# EAGLE board module_pcb v106 (EAGLE 9.7.0)
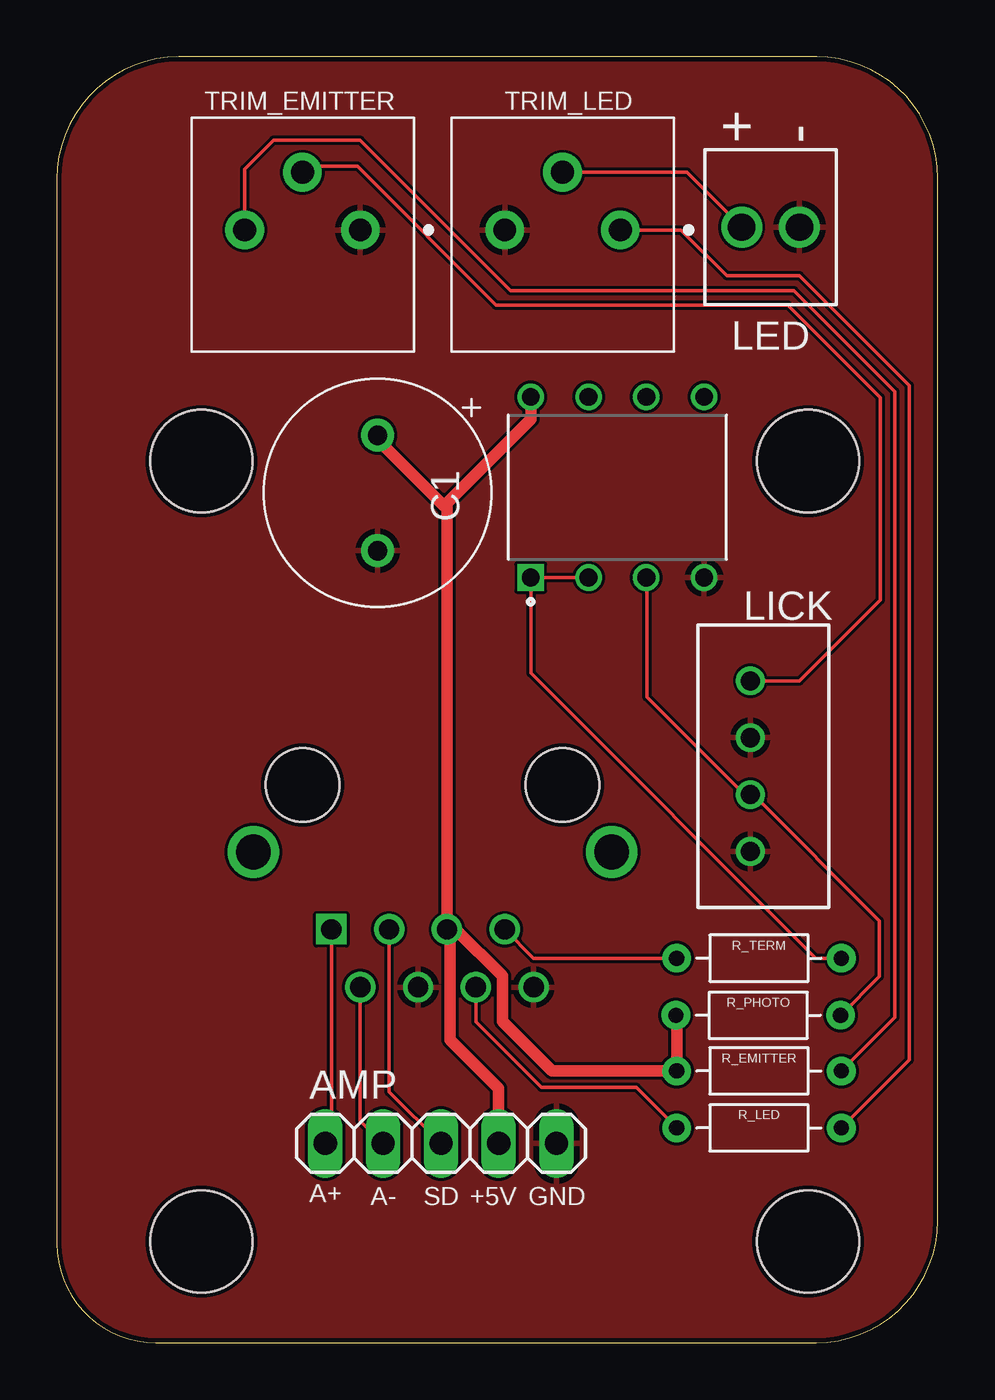
[diagram p0: board, top side]
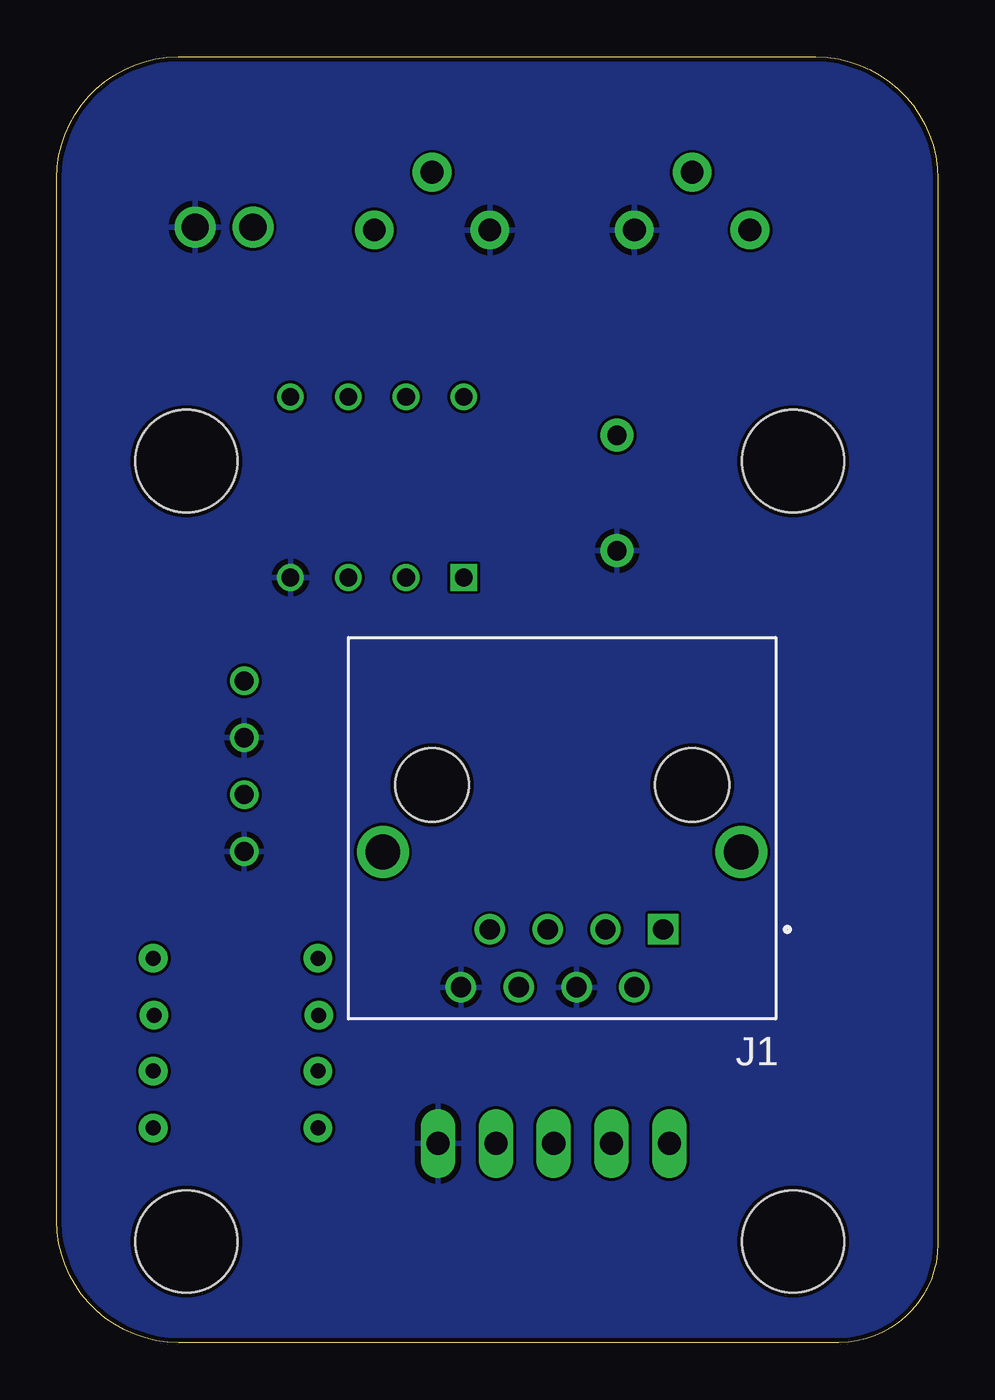
[diagram p1: board, bottom side, seen from below]

Size 38.72 x 56.5 mm. Coordinates in mm from the lower left corner, seen from the top.
Outline: 38.72,5.34 38.72,51.18 arc90 33.39,56.5 5.36,56.5 arc90 0,51.15 0,4.34 arc90 4.34,0 33.37,0 arc90 38.72,5.34
Copper layers (1*16): Top 0.035559375mm / dielectric 1.6mm / Bottom 0.035559375mm
Design rules "jlcpcb2layer": minimum track width 5mil, minimum drill 12mil, track to track 5mil, track to pad 5mil, pad to pad 5mil, via to via 5mil, smd to smd 5mil, copper to edge 8mil, drill to drill 6mil, minimum pad ring 5mil, minimum via ring 3mil, stop-mask expansion 2.5mil, vias tented up to drill 0mil, thermal gap 10mil
Holes 4.5 mm at 6.35,38.73 6.35,4.45 33.02,4.45 33.02,38.73

## Footprints (pad centres in the part's own frame; a part is rotated, then mirrored left to right if it is on the bottom)
1X05 = drill 1.016 long: 1 -5.08,0; 2 -2.54,0; 3 0,0; 4 2.54,0; 5 5.08,0
CAPPRD508W65D1000H1100B = drill 0.85 pad 1.45: 1 -2.54,0; 2 2.54,0
TE_5557969-1 = drill 0.89 square: 1 -4.445,6.35 | drill 0.89: 2 -3.175,8.89; 3 -1.905,6.35; 4 -0.635,8.89; 5 0.635,6.35; 6 1.905,8.89; 7 3.175,6.35; 8 4.445,8.89 | drill 1.52: S1 -7.875,2.95; S2 7.875,2.95 | hole 3.25: -5.715,0; 5.715,0
TERMBLK_254-2N = drill 1.2: 1 0,0; 2 2.54,0
B4B-XH-A = drill 0.84: 1 0,0; 2 2.5,0; 3 5,0; 4 7.5,0
RESAD724W46L381D178B = drill 0.66 pad 1.26: 1 -3.62,0; 2 3.62,0
PV36P = drill 1 pad 1.7: 1 0,0; 2 2.54,-2.54; 3 5.08,0
DIP794W45P254L959H508Q8 = drill 0.78 pad 1.13 square: 1 -3.97,3.81 | drill 0.78 pad 1.13: 2 -3.97,1.27; 3 -3.97,-1.27; 4 -3.97,-3.81; 5 3.97,-3.81; 6 3.97,-1.27; 7 3.97,1.27; 8 3.97,3.81

## Placement (x,y rotation side)
AMP  PINHD-1X5  [1X05]  16.88,8.75 180 top
C1  0.1µF  [CAPPRD508W65D1000H1100B]  14.1,37.34 270 top
J1  5557969-1  [TE_5557969-1]  16.51,24.51 180 bottom
LED  2828XX-2282834-2  [TERMBLK_254-2N]  32.64,49.02 180 top
LICK  B4B-XH-A  [B4B-XH-A]  30.48,29.08 270 top
R_EMITTER  68Ω  [RESAD724W46L381D178B]  30.86,11.94 180 top
R_LED  220Ω  [RESAD724W46L381D178B]  30.86,9.43 0 top
R_PHOTO  22kΩ  [RESAD724W46L381D178B]  30.83,14.39 180 top
R_TERM  50Ω  [RESAD724W46L381D178B]  30.86,16.89 180 top
TRIM_EMITTER  5kΩ  [PV36P]  13.33,48.9 180 top
TRIM_LED  1kΩ  [PV36P]  24.77,48.9 180 top
U1  LM6132BIN  [DIP794W45P254L959H508Q8]  24.64,37.59 90 top

## Library data of the parts
AMP = Connector; CATEGORY: Headers; DESCRIPTION: Header, Straight, 5 Position; MANUFACTURER: Generic; MPN: Generic; OPERATING_TEMPERATURE: Generic; PART_STATUS: Active; PITCH: 0.100" (2.54mm); ROHS_COMPLIANCE: Generic; SERIES: Generic; SUB-CATEGORY: Headers, Male Pins; TYPE: Board to Board or Cable, Unshrouded, Through Hole, Straight
C1 = Capacitor; CATEGORY: Capacitor
J1 = 5557969-1; MANUFACTURER: TE Connectivity; PARTREV: E; STANDARD: Manufacturer Recommendation
LED = Connector; CATEGORY: Fixed Terminal Blocks; DESCRIPTION: Fixed Terminal Blocks 2P SIDE ENTRY 2.54mm; MANUFACTURER: TE Connectivity AMP Connectors; MPN: 282834-2; OPERATING_TEMPERATURE: -40°C ~ 105°C; PART_STATUS: Active; PITCH: 0.100" (2.54mm); ROHS_COMPLIANCE: RoHS Compliant; SERIES: Buchanan; SUBCATEGORY: Terminal Blocks; TYPE: Through Hole; Screw - Rising Cage Clamp; Side wire entry, Horizontal with Board
LICK = Connector; CATEGORY: Header; DSECRIPTION: Connector Header Through Hole 4 position 0.098" (2.50mm); MANUFACTURER: JST Sales America Inc.; MPN: B4B-XH-A(LF)(SN); OPERATING_TEMPERATURE: -25 C to 85 C; PART_STATUS: ACTIVE; PITCH: 0.098" (2.50mm); ROHS_COMPLIANCE: ROHS3 Compliant; SERIES: XH; SUB_CATEGORY: Rectangular Connectors; TYPE: Header, Male Pin, Board to Cable/Wire, Through Hole
R_EMITTER R_LED R_PHOTO R_TERM = Resistor; CATEGORY: Resistor; SUB-CATEGORY: Fixed
TRIM_EMITTER TRIM_LED = Resistor; CATEGORY: Resistor; DESCRIPTION: Lead Sealed Type Multiturn PV36 Series; MANUFACTURER: BOURNS; MPN: PV36P; OPERATING_TEMPERATURE: -55 to +125 °C; PART_STATUS: Active; ROHS_COMPLIANCE: RoHS Compliant; SERIES: PV36; SUB-CATEGORY: Trimpot; TYPE: Lead Sealed
U1 = LM6132BIN

## Nets
+5V: AMP.2 C1.1 J1.5 R_EMITTER.2 R_PHOTO.2 U1.8
A+: AMP.5 J1.1
A-: AMP.4 J1.2
GND: AMP.1 C1.2 J1.4 J1.8 LED.1 LICK.2 LICK.4 TRIM_EMITTER.1 TRIM_LED.3 U1.4
LED_ON: J1.6 R_LED.1
LICK: LICK.3 R_PHOTO.1 U1.3
LICK_BUFF: R_TERM.1 U1.1 U1.2
LICK_FINAL: J1.7 R_TERM.2
SD: AMP.3 J1.3
TRIM_EMITTER_IN: R_EMITTER.1 TRIM_EMITTER.3
TRIM_EMITTER_OUT: LICK.1 TRIM_EMITTER.2
TRIM_LED_IN: R_LED.2 TRIM_LED.1
TRIM_LED_OUT: LED.2 TRIM_LED.2

## Tracks (layer width: path | path; a pad name or v marks a point on that pad's centre or on a via)
+5V
  Top 0.508: J1.5 17.27,18.03 17.27,13.31 19.42,11.16 AMP.2 | 17.14,36.9 J1.5 | J1.5 17.53,18.16 19.58,16.11 19.58,14.12 21.76,11.94 R_EMITTER.2 27.24,14.35 R_PHOTO.2 | 17.14,36.9 17.02,36.77 14.1,39.69 C1.1 | U1.8 20.83,40.58 17.14,36.9
A+
  Top 0.152: J1.1 12.06,9.02 AMP.5
A-
  Top 0.152: J1.2 13.33,9.75 AMP.4
GND
  pour Bottom: 4.34,0.08 33.37,0.08 34.01,0.11 34.63,0.23 35.24,0.42 35.82,0.68 36.36,1.01 36.86,1.4 37.31,1.85 37.71,2.35 38.04,2.9 38.3,3.48 38.49,4.08 38.6,4.71 38.64,5.35 38.64,51.18 38.6,51.81 38.49,52.44 38.3,53.04 38.04,53.62 37.71,54.16 37.32,54.66 36.87,55.11 36.37,55.5 35.83,55.83 35.25,56.09 34.65,56.27 34.03,56.39 33.39,56.43 5.36,56.43 4.67,56.38 3.99,56.25 3.33,56.02 2.72,55.72 2.14,55.34 1.62,54.88 1.17,54.36 0.78,53.79 0.48,53.17 0.26,52.51 0.12,51.84 0.08,51.15 0.08,4.34 0.11,3.78 0.22,3.23 0.4,2.71 0.65,2.21 0.96,1.74 1.32,1.32 1.74,0.96 2.21,0.65 2.71,0.4 3.23,0.22 3.78,0.11
  pour Top: 4.34,0.08 33.37,0.08 34.01,0.11 34.63,0.23 35.24,0.42 35.82,0.68 36.36,1.01 36.86,1.4 37.31,1.85 37.71,2.35 38.04,2.9 38.3,3.48 38.49,4.08 38.6,4.71 38.64,5.35 38.64,51.18 38.6,51.81 38.49,52.44 38.3,53.04 38.04,53.62 37.71,54.16 37.32,54.66 36.87,55.11 36.37,55.5 35.83,55.83 35.25,56.09 34.65,56.27 34.03,56.39 33.39,56.43 5.36,56.43 4.67,56.38 3.99,56.25 3.33,56.02 2.72,55.72 2.14,55.34 1.62,54.88 1.17,54.36 0.78,53.79 0.48,53.17 0.26,52.51 0.12,51.84 0.08,51.15 0.08,4.34 0.11,3.78 0.22,3.23 0.4,2.71 0.65,2.21 0.96,1.74 1.32,1.32 1.74,0.96 2.21,0.65 2.71,0.4 3.23,0.22 3.78,0.11
LED_ON
  Top 0.152: 18.43,15.64 J1.6 18.42,14.1 21.3,11.21 25.46,11.21 R_LED.1
LICK
  Top 0.152: R_PHOTO.1 36.15,16.09 36.15,18.54 30.61,24.08 LICK.3 30.23,24.08 25.93,28.38 25.93,33.6 U1.3
LICK_BUFF
  Top 0.152: R_TERM.1 33.36,16.89 20.83,29.42 U1.1 U1.2
LICK_FINAL
  Top 0.152: R_TERM.2 20.96,16.89 J1.7
SD
  Top 0.152: J1.3 14.6,11.02 AMP.3
TRIM_EMITTER_IN
  Top 0.152: 34.45,11.91 R_EMITTER.1 36.83,14.29 36.83,41.78 32.38,46.23 19.94,46.23 13.33,52.83 9.53,52.83 8.25,51.56 TRIM_EMITTER.3
TRIM_EMITTER_OUT
  Top 0.152: TRIM_EMITTER.2 11.05,51.69 13.21,51.69 19.3,45.59 32.13,45.59 36.2,41.53 36.2,32.64 32.64,29.08 LICK.1
TRIM_LED_IN
  Top 0.152: R_LED.2 37.47,12.42 37.47,42.05 32.63,46.89 29.44,46.89 27.43,48.9 TRIM_LED.1
TRIM_LED_OUT
  Top 0.152: TRIM_LED.2 27.69,51.44 LED.2

## Text on the board
tNames: + | - | A+ | A- | SD | +5V | GND